# Altium PCB Nano_Particle_Breakout.PcbDoc
Units mil, origin at the board's own origin, x right, y up, seen from the top; angles counter-clockwise.
Board outline 1500 x 3000 mil, 2 copper layers (Top Layer, Bottom Layer); 2 components, 20 nets, 58 pads, 0 vias.
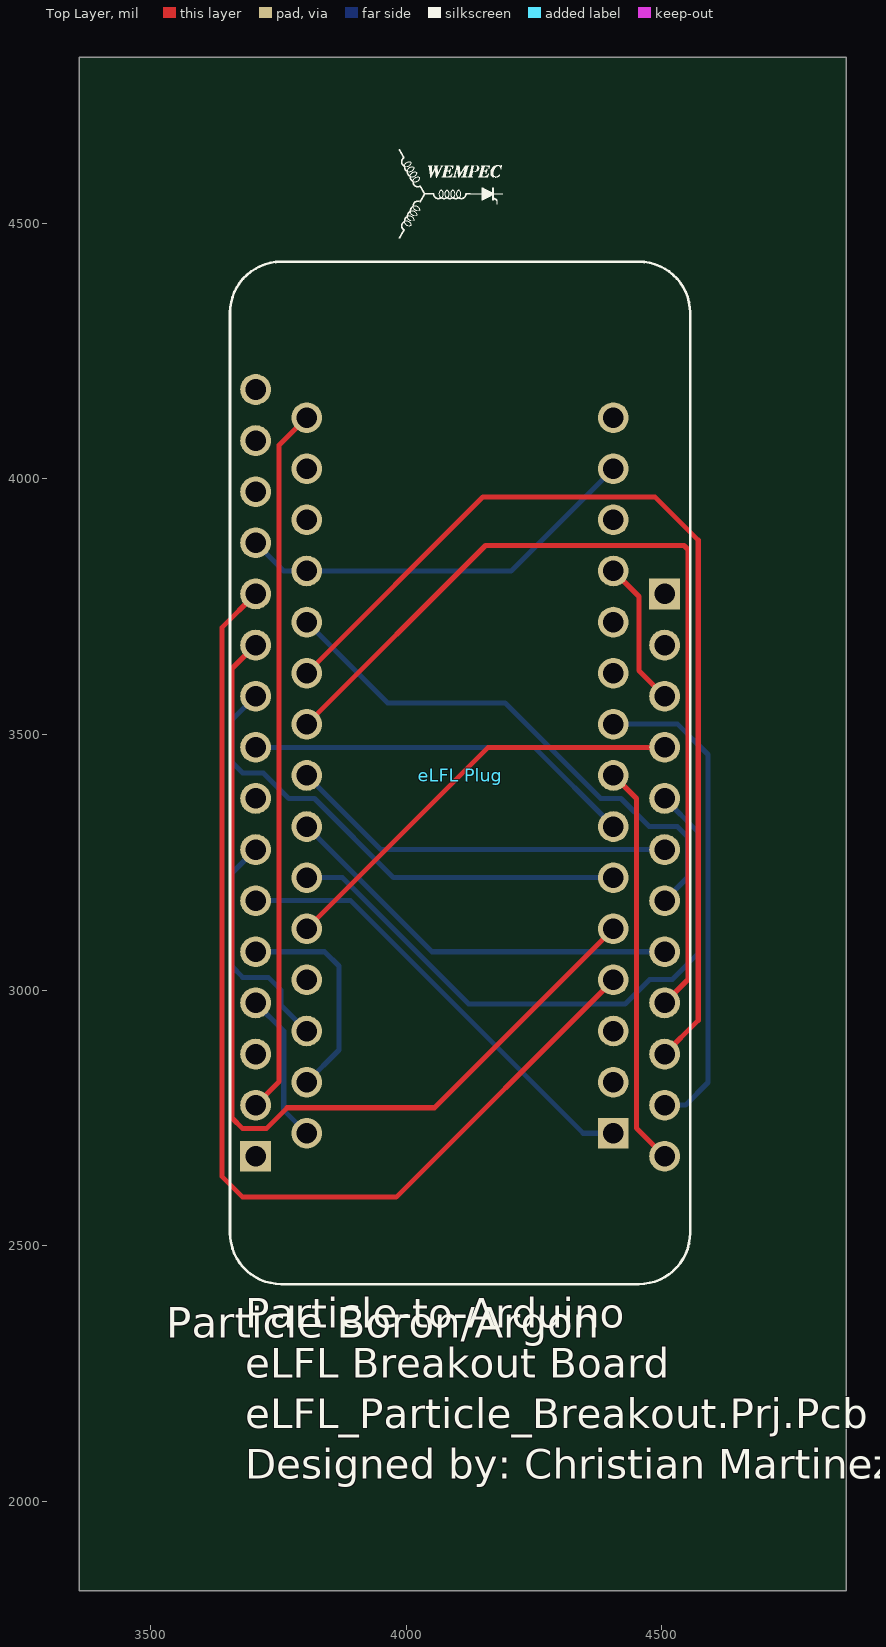
[diagram p0: Top Layer view]
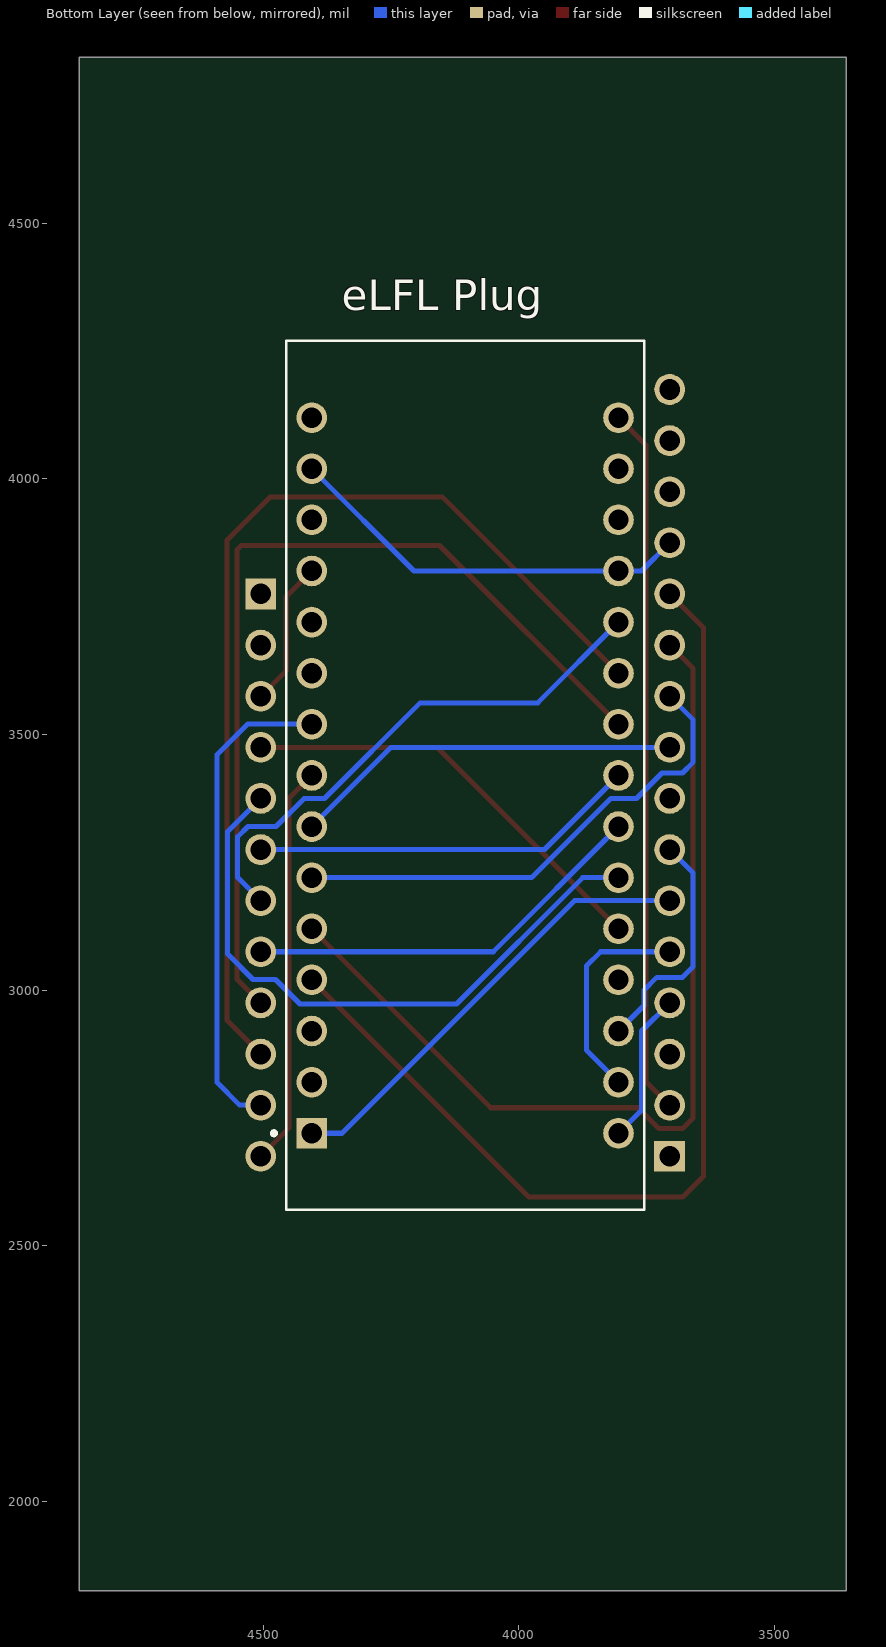
[diagram p1: Bottom Layer view, seen from below]

## Layer stack, top to bottom
Top Solder: solder mask 0.4, Solder Resist, Dk 3.5
Top Layer: signal copper 1.4
Dielectric 1: dielectric 12.6, FR-4, Dk 4.8
Bottom Layer: signal copper 1.4
Bottom Solder: solder mask 0.4, Solder Resist, Dk 3.5

## Board outline
3360,1825 3360,4825 4860,4825 4860,1825

## Design rules (kind name [scope] priority, off if disabled: settings)
Clearance [All] p1: gap=10 ignorepadtopadclearanceinfootprint=FALSE except(0: Arc-Hole Track-Hole SMDPad-Hole THPad-Hole Via-Hole Fill-Hole Poly-Hole Region-Hole Text-Hole)
PolygonConnect [All] p1: connectstyle=Relief reliefconductorwidth=10 reliefentries=4 polygonreliefangle="90 Angle" airgapwidth=10
RoutingVias [All] p1: holewidth=28 width=50 viastyle="Through Hole" minholewidth=28 minwidth=50 maxholewidth=28 maxwidth=50
SolderMaskExpansion [All] p1: expansion=4 istentingtop=FALSE
Width [All] p1: maxlimit=10 minlimit=10 preferedwidth=10
30 further rules are at their usual default settings.

## Components (designator, comment, footprint, x,y, rotation, side; value= is the part's Value field where it differs from the comment)
"eLFL Plug" "Arduino Nano Every" "ARDUINO PLUG" 4105,3420 r90 top (schematic designator U1)
"Particle Boron/Argon" "FEATHER_M0_BASIC_PROTO" PARTICLE_MODULE 4105,3425 r270 top (schematic designator U?)

## Footprints (in the part's own frame and the unit in brackets; to place one, negate y for a bottom-side part, rotate by r counter-clockwise, add the part's x,y. Pads: shape width x height; smd on the part's side, far side on the other; paste and mask are expansions set on the pad)
"ARDUINO PLUG" [mil]
  rect 60x60 hole 40: 1(-700,-300)
  round 60 hole 40: 2(-600,-300) 3(-500,-300) 4(-400,-300) 5(-300,-300) 6(-200,-300) 7(-100,-300) 8(0,-300) 9(100,-300) 10(200,-300) 11(300,-300) 12(400,-300) 13(500,-300) 14(600,-300) 15(700,-300) 16(700,300) 17(600,300) 18(500,300) 19(400,300) 20(300,300) 21(200,300) 22(100,300) 23(0,300) 24(-100,300) 25(-200,300) 26(-300,300) 27(-400,300) 28(-500,300) 29(-600,300) 30(-700,300)
PARTICLE_MODULE [mm]
  rect 1.53x1.53 hole 1.02: P1_1(19.05,-10.16) P2_1(-8.89,10.16)
  round 1.53 hole 1.02: P1_2(16.51,-10.16) P1_3(13.97,-10.16) P1_4(11.43,-10.16) P1_5(8.89,-10.16) P1_6(6.35,-10.16) P1_7(3.81,-10.16) P1_8(1.27,-10.16) P1_9(-1.27,-10.16) P1_10(-3.81,-10.16) P1_11(-6.35,-10.16) P1_12(-8.89,-10.16) P1_13(-11.43,-10.16) P1_14(-13.97,-10.16) P1_15(-16.51,-10.16) P1_16(-19.05,-10.16) P2_2(-6.35,10.16) P2_3(-3.81,10.16) P2_4(-1.27,10.16) P2_5(1.27,10.16) P2_6(3.81,10.16) P2_7(6.35,10.16) P2_8(8.89,10.16) P2_9(11.43,10.16) P2_10(13.97,10.16) P2_11(16.51,10.16) P2_12(19.05,10.16)
  silkscreen extent -25.4,-11.43 25.4,11.43

## Part data
"eLFL Plug": library part ABX00028, "ATmega4809 Arduino Nano Every AVR AVR MCU 8-Bit Embedded Evaluation Board", Package=None, Availability=Unavailable, MF="{'manufacturer': u'Arduino'}", MP=ABX00028, Price=None
"Particle Boron/Argon": "ATSAMD21G18 Feather M0 Basic Proto SAM D ARMÂ® CortexÂ®-M0+ MCU 32-Bit Embedded Evaluation Board", Package=None, Availability=Unavailable, MF="{'manufacturer': u'Adafruit Industries'}", MP=FEATHER_M0_BASIC_PROTO, Price=None

## Nets (pads, with @x,y where several pads share a name; then routed paths per layer and width w, separated by ;. In a path a pad name is that pad's centre, name@x,y a point inside that pad or via, vN(x,y) a via of type N, cw(c..) or ccw(c..) an arc to the next point about the centre after c; other vN are vias at no path point)
BAT_CUR: "eLFL Plug.6" "Particle Boron/Argon.P1_10" | length 987.7
  Bottom Layer w10: 3705,3575 3659,3529 3659,3446 3680,3425 3720,3425 3770,3375 3820,3375 3975,3220 4405,3220
BAT_V: "eLFL Plug.7" "Particle Boron/Argon.P1_9" | length 764.2
  Bottom Layer w10: 3705,3475 4250,3475 4405,3320
D7_TP: "eLFL Plug.25" "Particle Boron/Argon.P2_5" | length 1238.9
  Bottom Layer w10: 3805,3220 3875,3220 4122,2973 4428,2973 4476,3021 4520,3021 4570.12,3071.12 4570.12,3309.88 4505,3375
D8_TP: "eLFL Plug.26" "Particle Boron/Argon.P2_4" | length 847
  Top Layer w10: 3805,3120 4160,3475 4505,3475
DOOR_SENSE: "eLFL Plug.24" "Particle Boron/Argon.P2_8" | length 801.5
  Bottom Layer w10: 3805,3320 4050,3075 4505,3075
GND: "eLFL Plug.14" "eLFL Plug.19" "Particle Boron/Argon.P1_13" | length 805.6
  Bottom Layer w10: 3705,3875 3760,3820 3805,3820 4205,3820 4405,4020
GRN_LED: "eLFL Plug.23" "Particle Boron/Argon.P2_6" | length 760.1
  Bottom Layer w10: 3805,3420 3950,3275 4505,3275
LOAD_CUR: "eLFL Plug.5" "Particle Boron/Argon.P1_11" | length 1860.7
  Top Layer w10: 3705,3675 3659,3629 3659,2750 3680,2729 3726,2729 3767,2770 4055,2770 4405,3120
LORA_CS: "eLFL Plug.28" "Particle Boron/Argon.P1_7" | length 463.8
  Bottom Layer w10: 3705,3275 3659,3229 3659,3046 3680,3025 3730,3025 3755,3000 3755,2970 3805,2920
LORA_EN: "eLFL Plug.22" "Particle Boron/Argon.P2_9" | length 1800.3
  Top Layer w10: 3805,3520 4155,3870 4543,3870 4551,3862 4551,3021 4505,2975
LORA_G0: "eLFL Plug.21" "Particle Boron/Argon.P2_10" | length 1976.4
  Top Layer w10: 3805,3620 4150,3965 4486,3965 4571,3880 4571,2941 4505,2875
LORA_MISO: "eLFL Plug.30" "Particle Boron/Argon.P1_4" | length 296.4
  Bottom Layer w10: 3705,2975 3760,2920 3760,2765 3805,2720
LORA_MOSI: "eLFL Plug.29" "Particle Boron/Argon.P1_5" | length 427.7
  Bottom Layer w10: 3705,3075 3840,3075 3868,3047 3868,2883 3805,2820
LORA_SCK: "eLFL Plug.1" "Particle Boron/Argon.P1_6" | length 888.5
  Bottom Layer w10: 3705,3175 3891,3175 4346,2720 4405,2720
OPEN_TX: "eLFL Plug.16" "Particle Boron/Argon.P1_2" | length 1386.4
  Top Layer w10: 3705,2775 3751,2821 3751,4066 3805,4120
RED_LED: "eLFL Plug.20" "Particle Boron/Argon.P2_7" | length 1062.8
  Bottom Layer w10: 3805,3720 3963,3562 4193,3562 4380,3375 4420,3375 4474.88,3320.12 4530,3320.12 4550.12,3300 4550.12,3220.12 4505,3175
RTC_SCL: "eLFL Plug.9" "Particle Boron/Argon.P2_11" | length 955.6
  Bottom Layer w10: 4405,3520 4406,3521 4530,3521 4590.12,3460.88 4590.12,2819.12 4546,2775 4505,2775
RTC_SDA: "eLFL Plug.8" "Particle Boron/Argon.P2_12" | length 786.4
  Top Layer w10: 4405,3420 4450,3375 4450,2730 4505,2675
TMP: "eLFL Plug.4" "Particle Boron/Argon.P1_12" | length 2125.4
  Top Layer w10: 3705,3775 3639,3709 3639,2636 3680,2595 3980,2595 4405,3020
VCC: "eLFL Plug.12" "Particle Boron/Argon.P2_3" | length 286.4
  Top Layer w10: 4405,3820 4455,3770 4455,3625 4505,3575
pads on no net: "eLFL Plug.2" "eLFL Plug.3" "eLFL Plug.10" "eLFL Plug.11" "eLFL Plug.13" "eLFL Plug.15" "eLFL Plug.17" "eLFL Plug.18" "eLFL Plug.27" "Particle Boron/Argon.P1_1" "Particle Boron/Argon.P1_3" "Particle Boron/Argon.P1_8" "Particle Boron/Argon.P1_14" "Particle Boron/Argon.P1_15" "Particle Boron/Argon.P1_16" "Particle Boron/Argon.P2_1" "Particle Boron/Argon.P2_2"

## Silkscreen, mask and mechanical layers (free items; w line width, h text height)
Top Overlay:
  drawing of 7 lines, arcs and shapes, not listed
  text "Particle-to-Arduino / eLFL Breakout Board / eLFL_Particle_Breakout.Prj.Pcb / Designed by: Christian Martinez" at 3685,2025 h98.43
Mechanical 1:
  the board outline again, w10